# EAGLE board Sensorschakeling_Afstandssensoren_PCB_v1.0 (EAGLE 9.7.0)
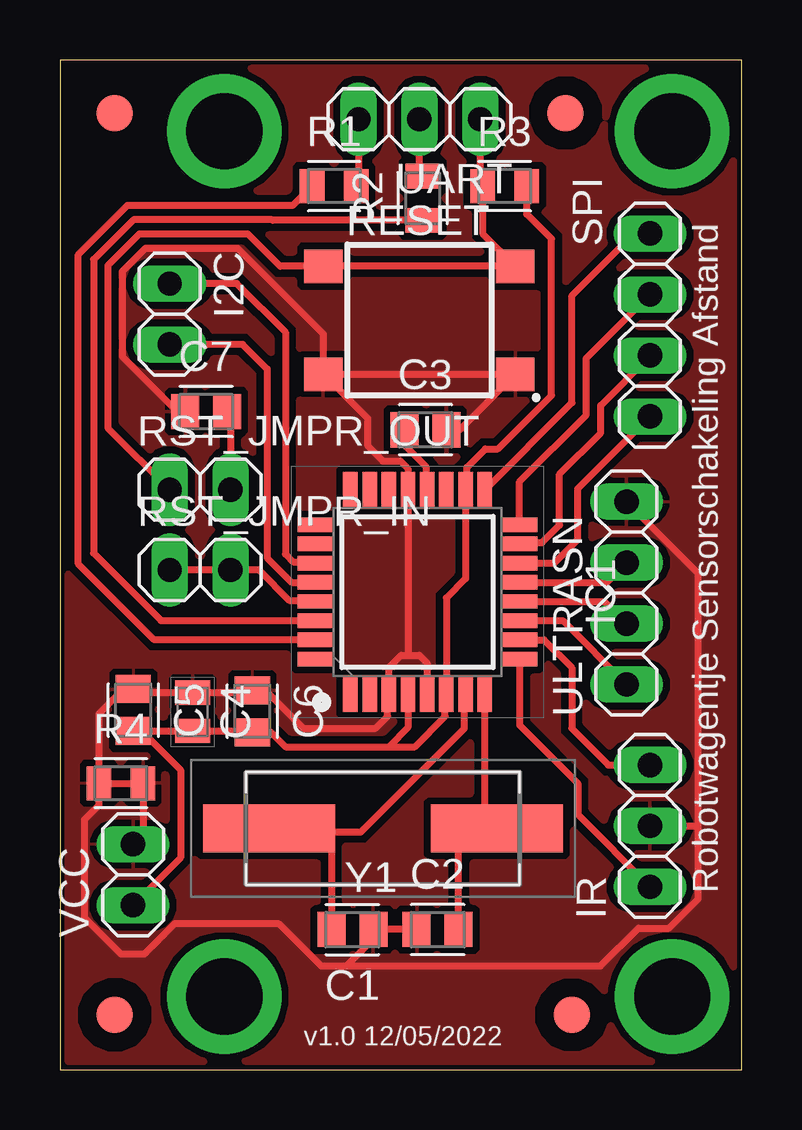
[diagram p0: board, top side]
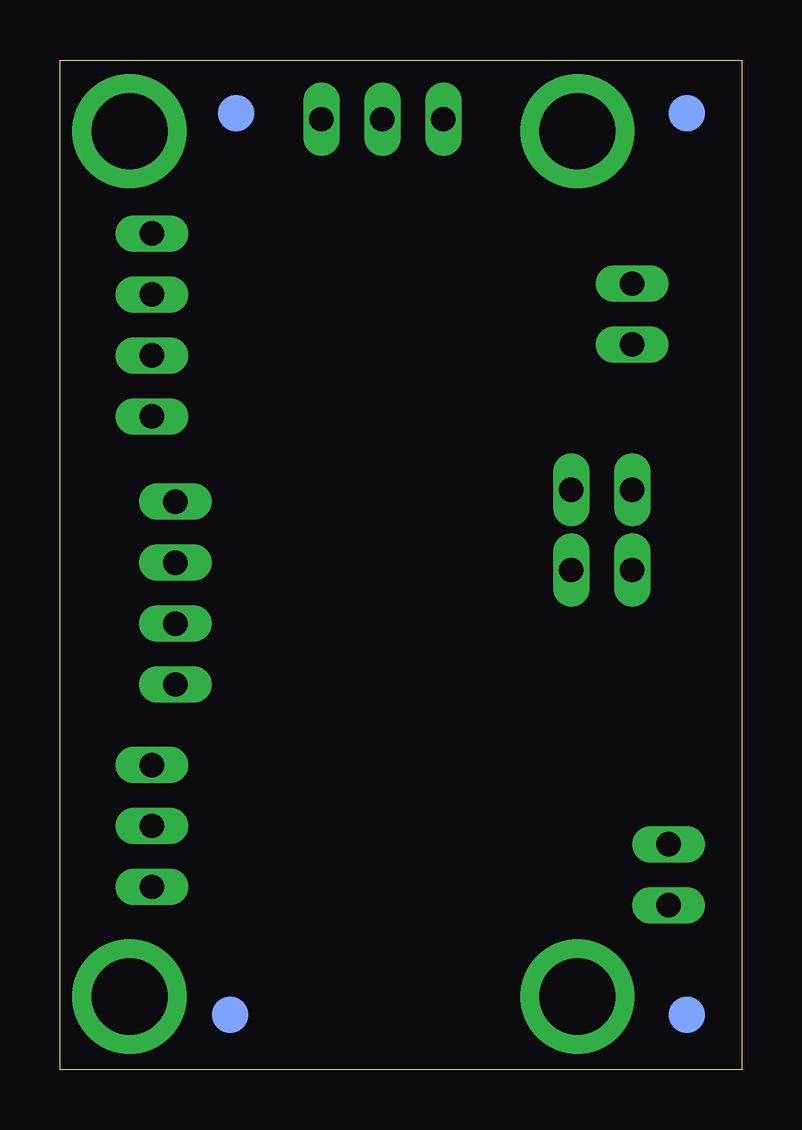
[diagram p1: board, bottom side, seen from below]

Size 28.43 x 42.09 mm. Coordinates in mm from the lower left corner, seen from the top.
Outline: 0,0 28.43,0 28.43,42.09 0,42.09 0,0
Copper layers (1*16): Top 0.035mm / dielectric 1.5mm / Bottom 0.035mm
Design rules "inhouse_fabricatie": minimum track width 0.2mm, minimum drill 0.35mm, track to track 0.3mm, track to pad 0.3mm, pad to pad 0.2mm, via to via 0.3mm, smd to smd 0.2mm, copper to edge 0.2mm, drill to drill 0.3mm, minimum pad ring 0.1mm, minimum via ring 0.1mm, stop-mask expansion 4mil, vias tented up to drill 0mil, thermal gap 10mil

## Footprints (pad centres in the part's own frame; a part is rotated, then mirrored left to right if it is on the bottom)
CAPC2012X110 = smd 1.165 x 1.465: 1 -0.875,0; 2 0.875,0
CAPC2012X145N = smd 1.02 x 1.47: 1 -0.8,0; 2 0.8,0
FID_060_P = smd 1.524 x 1.524 bottom: FIDB 0,0 | smd 1.524 x 1.524: FIDT 0,0
1X02 = drill 1.016 long: 1 -1.27,0; 2 1.27,0
QFP80P900X900X120-32N = smd 1.5 x 0.6: 1 -4.25,2.8; 2 -4.25,2; 3 -4.25,1.2; 4 -4.25,0.4; 5 -4.25,-0.4; 6 -4.25,-1.2; 7 -4.25,-2; 8 -4.25,-2.8; 17 4.25,-2.8; 18 4.25,-2; 19 4.25,-1.2; 20 4.25,-0.4; 21 4.25,0.4; 22 4.25,1.2; 23 4.25,2; 24 4.25,2.8 | smd 0.6 x 1.5: 9 -2.8,-4.25; 10 -2,-4.25; 11 -1.2,-4.25; 12 -0.4,-4.25; 13 0.4,-4.25; 14 1.2,-4.25; 15 2,-4.25; 16 2.8,-4.25; 25 2.8,4.25; 26 2,4.25; 27 1.2,4.25; 28 0.4,4.25; 29 -0.4,4.25; 30 -1.2,4.25; 31 -2,4.25; 32 -2.8,4.25
1X03 = drill 1.016 long: 1 -2.54,0; 2 0,0; 3 2.54,0
BEAGLEBONEBLACK_MOUNTING_HOLE = drill 3.175 pad 4.445: P$1 0,0
RESC2012X65 = smd 1.031 x 1.42: 1 -0.919,0; 2 0.919,0
B3FS-1000P = smd 1.6 x 1.4: 1 4,-2.25; 2 -4,-2.25; 3 4,2.25; 4 -4,2.25
1X04 = drill 1.016 long: 1 -3.81,0; 2 -1.27,0; 3 1.27,0; 4 3.81,0
HC49SM830506016ATF = smd 5.5 x 2: 1 -4.75,0; 2 4.75,0

## Placement (x,y rotation side)
C1  22pF  [CAPC2012X110]  12.19,5.84 180 top
C2  22pF  [CAPC2012X110]  15.75,5.84 0 top
C3  100nF  [CAPC2012X110]  15.24,26.67 0 top
C4  4.7uF_16V  [CAPC2012X145N]  5.53,14.92 270 top
C5  1uF  [CAPC2012X110]  3.06,14.99 270 top
C6  1uF  [CAPC2012X110]  8.02,14.94 270 top
C7  10uF  [CAPC2012X110]  6.1,27.43 0 top
FD1  FID_60MIL_P  [FID_060_P]  21.34,2.29 0 top
FD2  FID_60MIL_P  [FID_060_P]  2.29,2.29 0 top
FD3  FID_60MIL_P  [FID_060_P]  21.08,39.88 0 top
FD4  FID_60MIL_P  [FID_060_P]  2.29,39.88 0 top
I2C  [1X02]  4.57,31.5 270 top
IC1  ATMEGA328P-AN  [QFP80P900X900X120-32N]  14.91,19.91 90 top
IR  PINHD-1X3  [1X03]  24.6,10.16 90 top
MGT1  BEAGLEBONEBLACK_MOUNTING_HOLE  [BEAGLEBONEBLACK_MOUNTING_HOLE]  25.53,39.12 0 top
MGT2  BEAGLEBONEBLACK_MOUNTING_HOLE  [BEAGLEBONEBLACK_MOUNTING_HOLE]  25.53,3.05 0 top
MGT3  BEAGLEBONEBLACK_MOUNTING_HOLE  [BEAGLEBONEBLACK_MOUNTING_HOLE]  6.86,39.12 0 top
MGT4  BEAGLEBONEBLACK_MOUNTING_HOLE  [BEAGLEBONEBLACK_MOUNTING_HOLE]  6.86,3.05 0 top
R1  1kΩ  [RESC2012X65]  11.43,36.83 0 top
R2  1kΩ  [RESC2012X65]  15.12,36.32 90 top
R3  1kΩ  [RESC2012X65]  18.54,36.83 0 top
R4  1kΩ  [RESC2012X65]  2.54,11.94 0 top
RESET  B3FS-1000P  [B3FS-1000P]  14.99,31.24 0 top
RST_JMPR_IN  [1X02]  5.84,20.83 0 top
RST_JMPR_OUT  [1X02]  5.84,24.18 0 top
SPI  PINHD-1X4  [1X04]  24.6,31.04 270 top
UART  [1X03]  14.99,39.62 180 top
ULTRASN  PINHD-1X4  [1X04]  23.62,19.87 90 top
VCC  [1X02]  3.05,8.13 90 top
Y1  16MHz  [HC49SM830506016ATF]  13.46,10.06 180 top

## Library data of the parts
C1-C3 C5-C7 = Capacitor; CATEGORY: Capacitor
C4 = CC0805ZKY5V7BB475; ARROW_PART_NUMBER: CC0805ZKY5V7BB475; ARROW_PRICE-STOCK: https://www.arrow.com/en/products/cc0805zky5v7bb475/yageo; DESCRIPTION: YAGEO - CC0805ZKY5V7BB475 - SMD Multilayer Ceramic Capacitor, 4.7 F, 16 V, 0805 [2012 Metric], +80%, -20%, Y5V, CC Series; HEIGHT: 1.45mm; MANUFACTURER_NAME: KEMET; MANUFACTURER_PART_NUMBER: CC0805ZKY5V7BB475; MOUSER_PART_NUMBER: 603-CC805ZKY5V7BB475; MOUSER_PRICE-STOCK: https://www.mouser.co.uk/ProductDetail/Yageo/CC0805ZKY5V7BB475?qs=7s%252B3O6pAiyA4wtTM471wUA%3D%3D
FD1-FD4 = Fiducial
I2C RST_JMPR_IN RST_JMPR_OUT UART VCC = pinhead
IC1 = ATMEGA328P-AN; ARROW_PART_NUMBER: ATMEGA328P-AN; ARROW_PRICE-STOCK: https://www.arrow.com/en/products/atmega328p-an/microchip-technology?region=nac; DESCRIPTION: MCU 8-bit ATmega AVR RISC 32KB Flash Atmel ATMEGA328P-AN, 8bit AVR Microcontroller, 20MHz, 32 kB Flash, 32-Pin TQFP; HEIGHT: 1.2mm; MANUFACTURER_NAME: Microchip; MANUFACTURER_PART_NUMBER: ATMEGA328P-AN; MOUSER_PART_NUMBER: 556-ATMEGA328P-AN; MOUSER_PRICE-STOCK: https://www.mouser.co.uk/ProductDetail/Microchip-Technology-Atmel/ATMEGA328P-AN?qs=6Dg1WZIWLC6WK556tw8xAw%3D%3D
IR SPI ULTRASN = Connector; CATEGORY: CONNECTOR; SUB-CATEGORY: PIN-HEADER
MGT1-MGT4 = BeagleBone_Black_Wireless
R1-R4 = Resistor; CATEGORY: Resistor; SUB-CATEGORY: Fixed
RESET = B3FS-1000P; ARROW_PART_NUMBER: B3FS-1000P; ARROW_PRICE-STOCK: https://www.arrow.com/en/products/b3fs-1000p/omron?region=nac; DESCRIPTION: Switch Tact,6x6mm,flat act,gen purp,tape Plunger Tactile Switch, SPST-NO 0.05 A@ 24 V dc 0.5mm; HEIGHT: mm; MANUFACTURER_NAME: Omron Electronics; MANUFACTURER_PART_NUMBER: B3FS-1000P; MOUSER_PART_NUMBER: 653-B3FS-1000P; MOUSER_PRICE-STOCK: https://www.mouser.co.uk/ProductDetail/Omron-Electronics/B3FS-1000P?qs=ImaqFqjHA4k6odVF2%2FXWpQ%3D%3D
Y1 = HC49SM-8-30-50-60-16-ATF; DESCRIPTION: MULTICOMP - HC49SM-8-30-50-60-16-ATF - CRYSTAL, 8MHZ, 16PF, SMD; HEIGHT: 4mm; MANUFACTURER_NAME: MULTICOMP; MANUFACTURER_PART_NUMBER: HC49SM-8-30-50-60-16-ATF

## Nets
AREF: C3.1 IC1.20
ECHO: IC1.12 ULTRASN.2
GND: C1.1 C2.1 C3.2 C4.1 C5.1 C6.1 C7.1 IC1.3 IC1.5 IC1.21 IR.2 R4.1 R4.2 RESET.1 RESET.2 ULTRASN.4 VCC.2
IR_ON/OFF: IC1.10 IR.3
MISO: IC1.16 SPI.2
MOSI: IC1.15 SPI.3
N$1: IC1.31 R1.1
N$2: IC1.30 R2.1
RST: IC1.29 RST_JMPR_IN.1 RST_JMPR_IN.2
RST_C: C7.2 RST_JMPR_OUT.2
RST_USB: R3.1 RESET.3 RESET.4 RST_JMPR_OUT.1 UART.1
RX: R2.2 UART.2
SCK: IC1.17 SPI.1
SCL: I2C.2 IC1.28
SDA: I2C.1 IC1.27
SS: IC1.14 SPI.4
TOSC1: C1.2 IC1.7 Y1.2
TOSC2: C2.2 IC1.8 Y1.1
TRIG: IC1.11 ULTRASN.1
TX: R1.2 UART.3
ULTRASN_ON/OFF: IC1.13 ULTRASN.3
VCC: C4.2 C5.2 C6.2 IC1.4 IC1.6 IC1.18 R3.2 VCC.1
VOUT: IC1.9 IR.1

## Tracks (layer width: path | path; a pad name or v marks a point on that pad's centre or on a via)
AREF
  Top 0.3: IC1.20 15.26,24.21 15.26,25.15 14.37,26.04 C3.1
ECHO
  Top 0.3: IC1.12 22.7,19.51 ULTRASN.2
GND
  Top 0.3: C2.1 C1.1 13.07,5.45 11.94,4.32 | C5.1 3.11,15.81 | 3.11,15.81 3.2,15.72 C4.1 7.93,15.72 C6.1 8.57,15.81 10.16,14.22 13.16,14.22 13.66,14.73 13.66,15.61 IC1.3 13.71,16.76 14.22,17.27 14.48,17.27 | 14.48,17.27 14.99,17.27 15.31,16.95 IC1.5 | RESET.2 RESET.1 16.66,26.67 C3.2 | RESET.2 12.82,27.15 12.82,26 13.47,25.36 14.2,25.36 14.51,25.05 IC1.21 14.51,17.3 14.48,17.27 | RESET.2 10.99,30.67 7.42,34.23 3.56,34.23 2.6,33.27 2.6,29.72 4.89,27.43 C7.1 | 3.11,15.81 2.6,15.81 1.62,14.83 R4.1 | R4.1 R4.2 3.46,9.81 VCC.2 | R4.1 1.62,11.02 1.02,10.41 1.02,6.35 2.54,4.83 3.53,4.83 4.8,6.1 9.11,6.1 10.89,4.32 11.94,4.32 | IR.2 26.61,10.16 | 11.94,4.32 22.54,4.32 24.12,5.9 25.39,5.9 26.61,7.12 26.61,10.16 | 26.61,10.16 26.61,20.69 ULTRASN.4
  pour Top: -0.25,42.42 -0.25,-0.51 28.96,-0.51 28.96,42.42
IR_ON/OFF
  Top 0.3: IC1.10 20.19,17.91 21.34,16.76 21.34,14.22 22.86,12.7 IR.3
MISO
  Top 0.3: SPI.2 21.94,29.66 21.94,27.3 19.16,24.51 IC1.16
MOSI
  Top 0.3: IC1.15 19.21,21.96 20.1,21.96 20.83,22.7 20.83,24.82 22.54,26.54 22.54,27.69 24.6,29.75 SPI.3
N$1
  Top 0.3: IC1.31 3.93,17.91 0.76,21.08 0.76,33.98 2.81,36.03 9.71,36.03 R1.1
N$2
  Top 0.3: R2.1 8.88,35.4 8.85,35.43 3.06,35.43 1.4,33.77 1.4,21.53 4.21,18.71 IC1.30
RST
  Top 0.3: IC1.29 10.61,19.56 9.56,19.56 8.29,20.83 RST_JMPR_IN.2 RST_JMPR_IN.1
RST_C
  Top 0.3: C7.2 7.11,27.29 RST_JMPR_OUT.2
RST_USB
  Top 0.3: UART.1 17.53,36.93 R3.1 17.62,34.85 RESET.3 RESET.4 9.18,33.49 7.84,34.83 3.31,34.83 2,33.52 2,26.75 RST_JMPR_OUT.1
RX
  Top 0.3: UART.2 14.99,37.37 R2.2
SCK
  Top 0.3: SPI.1 23.93,34.85 21.34,32.27 21.34,27.8 IC1.17
SCL
  Top 0.3: IC1.28 9.66,20.31 8.64,21.34 8.64,29.21 7.62,30.23 I2C.2
SDA
  Top 0.3: IC1.27 10.61,21.16 9.72,21.16 9.4,21.49 9.4,30.73 7.37,32.77 I2C.1
SS
  Top 0.3: IC1.14 20.61,21.11 21.59,22.1 21.59,24.22 SPI.4
TOSC1
  Top 0.3: 11.32,9.91 C1.2 | Y1.2 8.81,10.16 10.92,10.16 11.06,10.02 11.06,9.91 11.32,9.91 | IC1.7 16.86,15.61 16.86,14.22 12.55,9.91 11.32,9.91
TOSC2
  Top 0.3: C2.2 16.62,9.54 16,10.16 17.78,10.16 | 17.78,10.16 18.11,10.16 Y1.1 | IC1.8 17.71,10.23 17.78,10.16
TRIG
  Top 0.3: IC1.11 20.96,18.71 ULTRASN.1
TX
  Top 0.3: UART.3 12.45,36.93 R1.2
ULTRASN_ON/OFF
  Top 0.3: IC1.13 22.8,20.31 ULTRASN.3
VCC
  Top 0.3: 13.72,13.46 9.4,13.46 8.8,14.06 C6.2 7.97,14.12 C4.2 C5.2 3.42,14.11 5.02,12.5 5.02,8.83 VCC.1 | 13.72,13.46 14.79,13.46 16.06,14.73 16.06,15.61 IC1.6 16.11,19.67 16.91,20.47 IC1.18 16.96,24.21 16.96,25.1 17.73,25.87 18.26,25.87 20.49,28.11 20.49,34.63 19.46,35.66 R3.2 | IC1.4 14.51,14.26 13.72,13.46
VOUT
  Top 0.3: IC1.9 19.16,14.37 21.59,11.94 21.59,10.63 IR.1

## Text on the board
tNames: Robotwagentje Sensorschakeling Afstand | v1.0 12/05/2022